# Altium PCB dAir-aster-0_0_0_2.PcbDoc (part 1 of 2)
Units mm, origin at the board's own origin, x right, y up, seen from the top; angles counter-clockwise.
Board outline 87.04 x 95 mm, 2 copper layers (Top Layer, Bottom Layer); 84 components, 50 nets, 318 pads, 280 vias.
Unrouted connection lines stored in the file: 4.
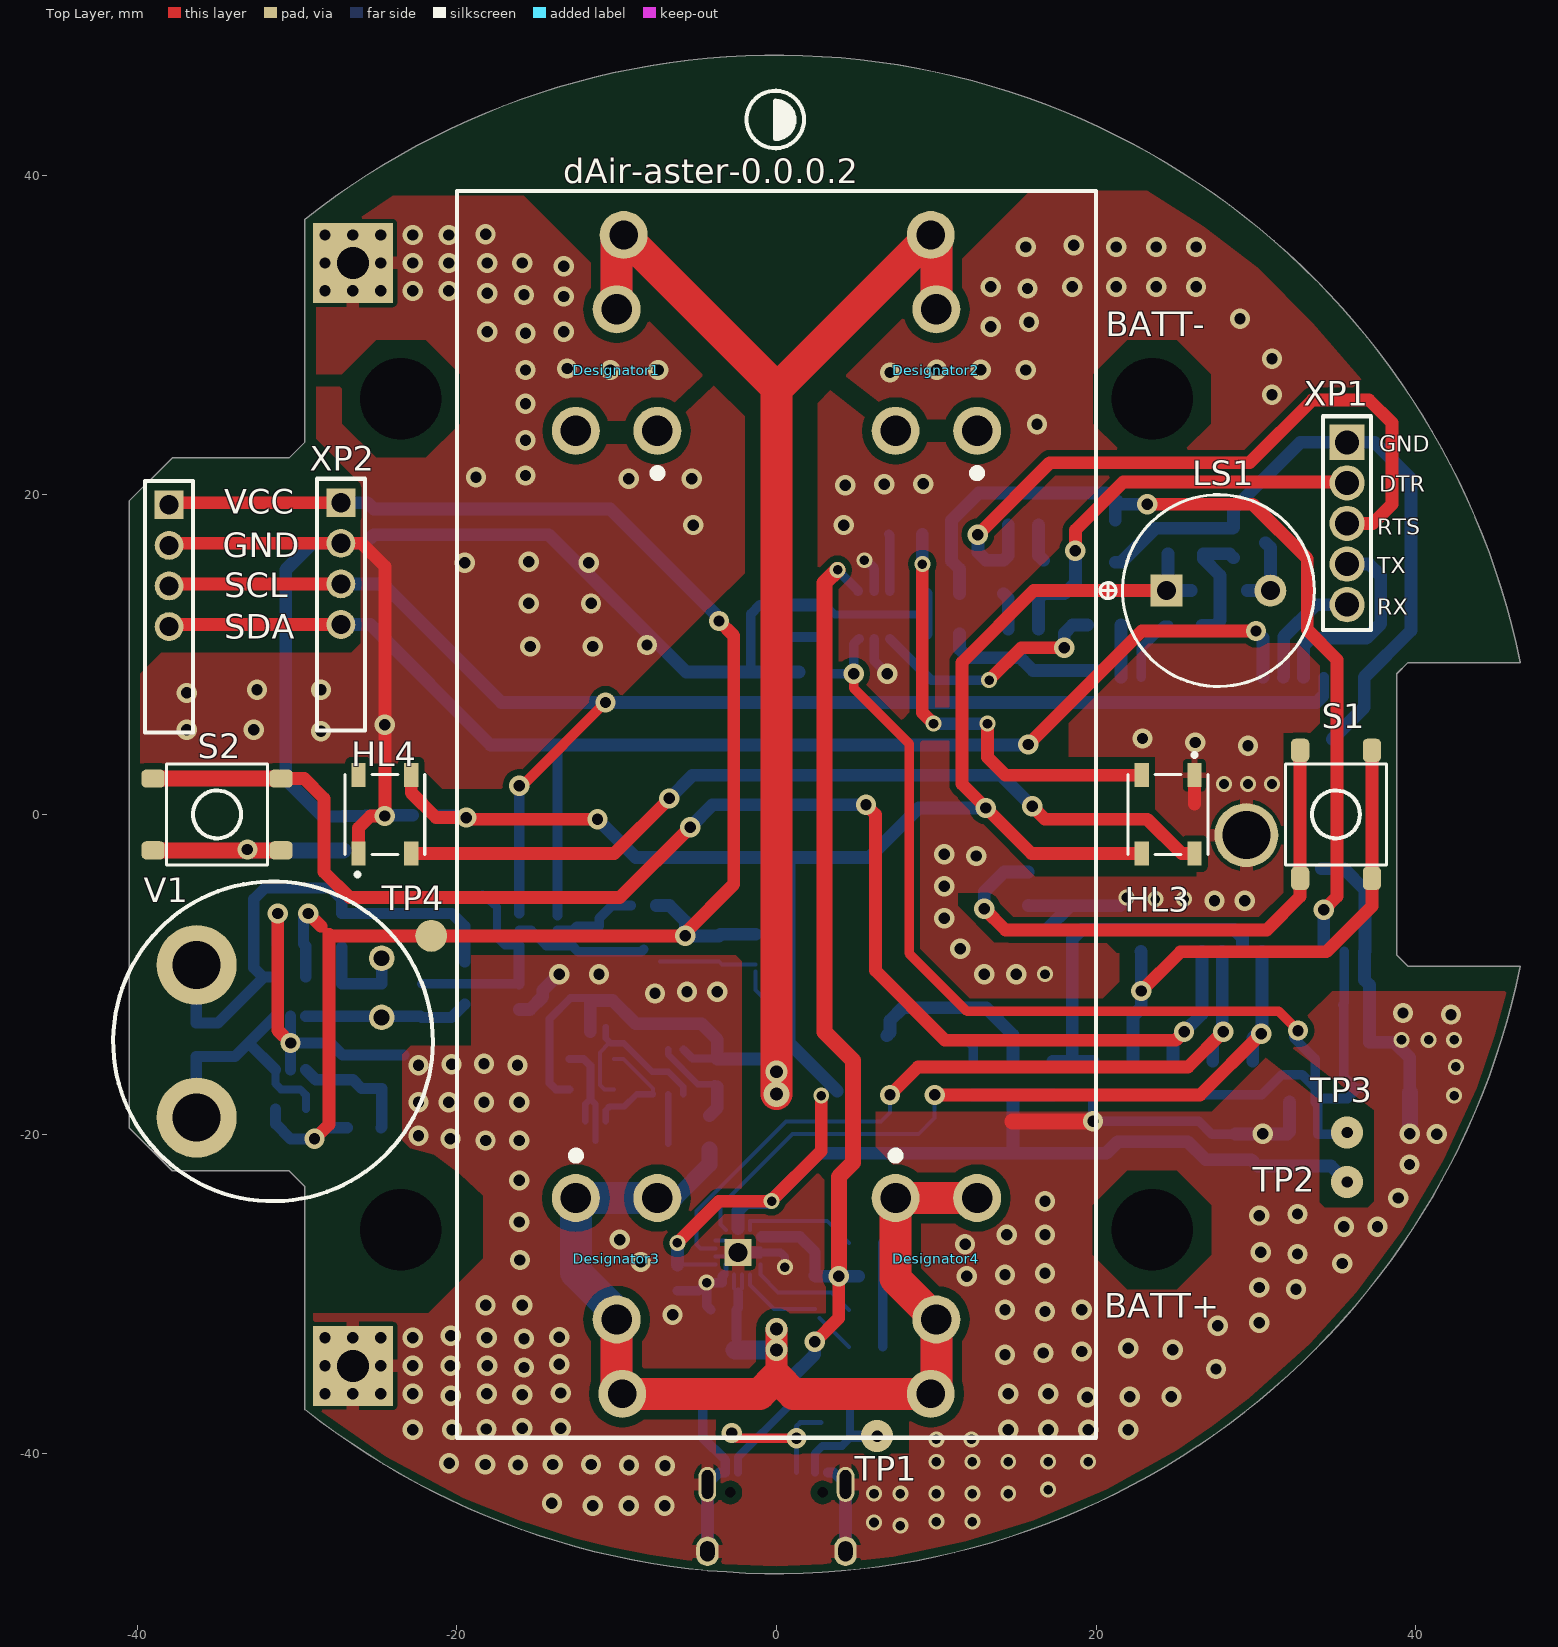
[diagram p0: Top Layer view]
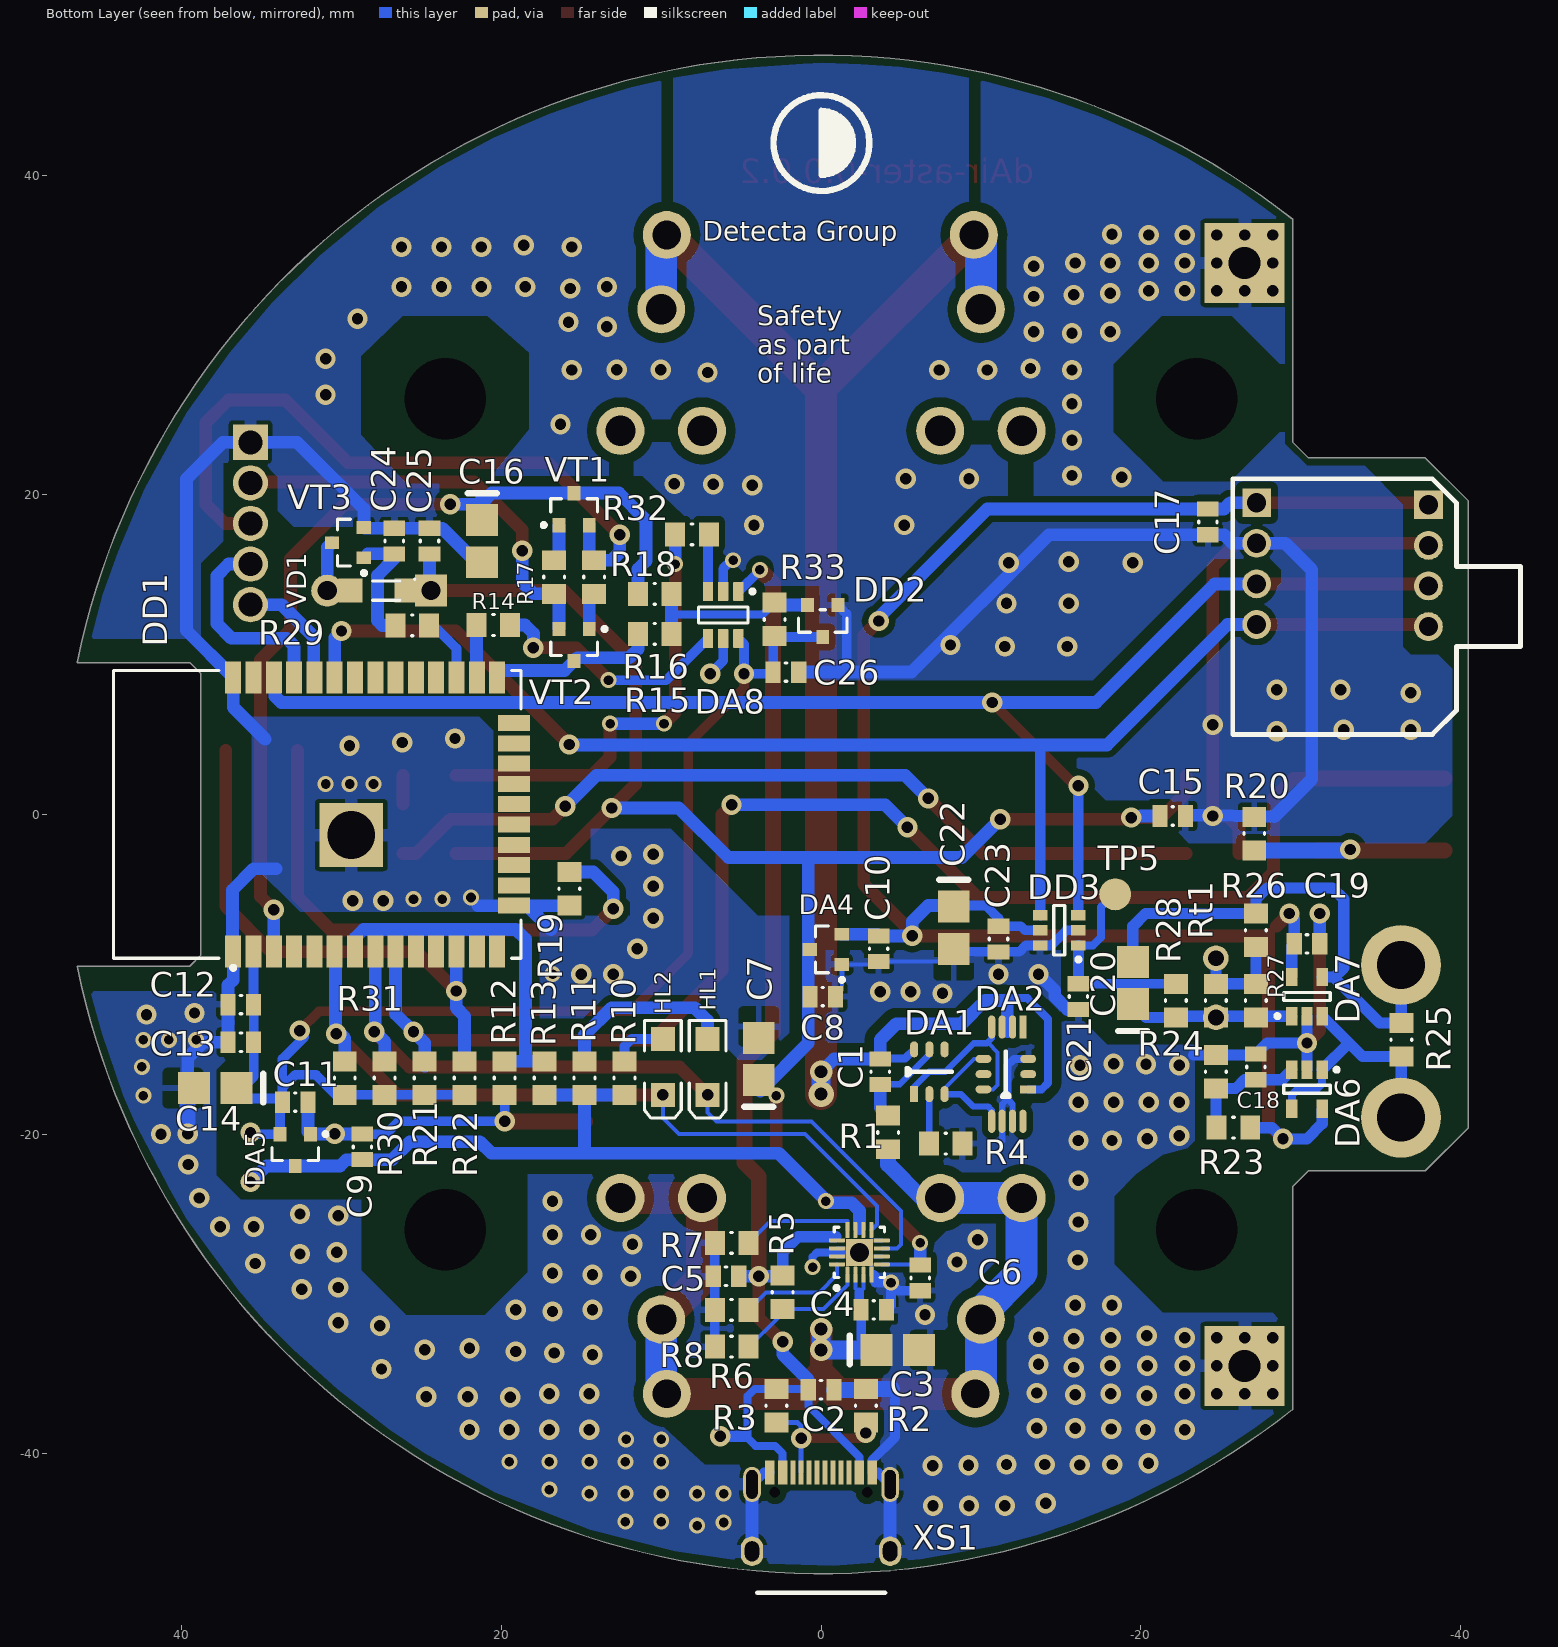
[diagram p1: Bottom Layer view, seen from below]
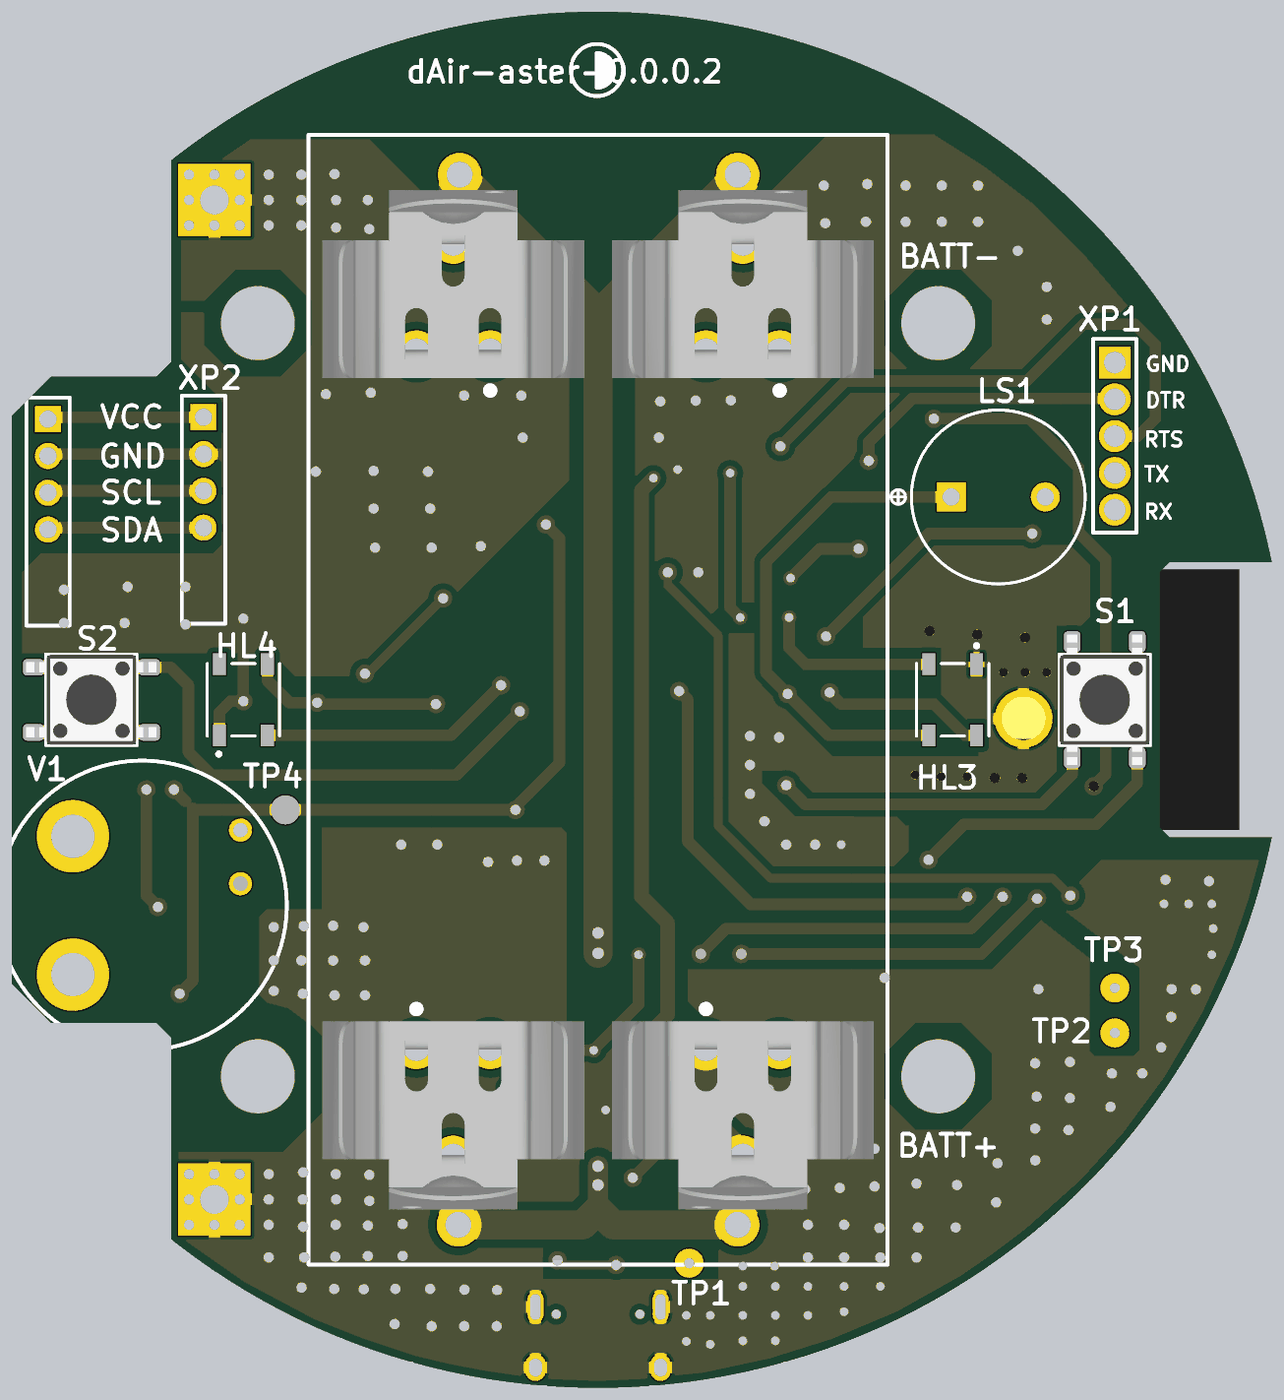
[diagram p2: 3D render of the assembled board from above, using the file's embedded part models]

## Layer stack, top to bottom
Top Solder: solder mask 0.0102, Solder Resist, Dk 3.5
Top Layer: signal copper 0.0356
Dielectric 1: dielectric 0.32, FR-4, Dk 4.8
Bottom Layer: signal copper 0.0356
Bottom Solder: solder mask 0.0102, Solder Resist, Dk 3.5

## Board outline
-37.8,-22.3 -40.5,-19.6 -40.5,19.6 -37.8,22.3 -30.5,22.3 -29.5,23.3 -29.5,37.225 -29.505,37.225 cw(c0,0) 46.54,9.5 46.539,9.5 39.5,9.5 38.8,8.8 38.8,-8.8 39.5,-9.5 46.539,-9.5 46.54,-9.5 cw(c0,0) -29.495,-37.233 -29.5,-37.24 -29.5,-23.3 -30.5,-22.3

## Design rules (kind name [scope] priority, off if disabled: settings)
Clearance bat- [InNet('NetBAT1_2') vs InNet('GND')] p1: gap=0.6 ignorepadtopadclearanceinfootprint=FALSE
Clearance bat [InNet('NetBAT1_1') vs InNet('GND')] p2: gap=0.6 ignorepadtopadclearanceinfootprint=FALSE
Clearance Polygons [InNet('GND')] p3: gap=0.4 ignorepadtopadclearanceinfootprint=FALSE
Clearance [All] p4: gap=0.15 ignorepadtopadclearanceinfootprint=FALSE
PlaneConnect [InNet('GND')] p1: planeconnectstyle=Direct reliefexpansion=0.508 reliefentries=4 reliefconductorwidth=0.5 reliefairgap=0.254
PolygonConnect [InNet('GND')] p1: thpad.connectstyle=Relief thpad.reliefconductorwidth=0.8 thpad.reliefentries=4 thpad.polygonreliefangle="90 Angle" thpad.airgapwidth=0.254 smdpad.connectstyle=Relief smdpad.reliefconductorwidth=0.4 smdpad.reliefentries=4 smdpad.polygonreliefangle="90 Angle" smdpad.airgapwidth=0.254 via.connectstyle=Direct via.reliefconductorwidth=0.254 via.reliefentries=4 via.polygonreliefangle="90 Angle" via.airgapwidth=0.254
RoutingVias [All] p1: holewidth=0.711 width=1.27 viastyle="Through Hole" minholewidth=0.711 minwidth=1.27 maxholewidth=0.711 maxwidth=1.27
SolderMaskExpansion [All] p1: expansion=0.102
Width [All] p1: maxlimit=3 minlimit=0.2 preferedwidth=0.254
29 further rules are at their usual default settings.

## Classes and differential pairs
component class dAir-type-C: C1 C2 C3 C4 C5 C6 C7 C8 C9 C10 C11 C12 C13 C14 C15 C16 C17 C18 C19 C20 C21 C22 C23 C24 C25 DA1 DA2 DA4 DA5 DA6 DA7 DD1 DD2 DD3 HL1 HL2 LS1 R1 R2 R3 R4 R5 R6 R7 R8 R10 R11 R12 R13 R14 R15 R16 R17 R18 R19 R20 R21 R22 R23 R24 R25 R26 R27 R28 R29 R30 R31 Rt1 S2 V1 VD1 VT1 VT2 VT3 XS1

## Components (designator, comment, footprint, x,y, rotation, side; value= is the part's Value field where it differs from the comment)
C1 "100nF" CAPC0805(2012)155_L -3.7,-16.1 r90 bottom value=4.7uF
C2 "100nF" CAPC0805(2012)155_L 0,-36 r180 bottom value=4.7uF
C3 "47uF" KEMT-A-3216-18-2_M -4.8,-33.5 r180 bottom
C4 "4.7uF" CAPC0805(2012)155_L -3.3,-31 r180 bottom
C5 "1uF" CAPC0805(2012)155_L 5.95,-28.9 r0 bottom value=4.7uF
C6 "4.7uF" CAPC0805(2012)155_L -6.2,-29 r270 bottom
C7 "47uF" KEMT-A-3216-18-2_M 3.9,-15.3 r90 bottom
C8 "1uF" CAPC0805(2012)155_L -0.1,-11.4 r0 bottom value=4.7uF
C9 "1uF" CAPC0805(2012)155_L 28.7,-20.8 r270 bottom value=4.7uF
C10 "1uF" CAPC0805(2012)155_L -3.6,-8.4 r90 bottom value=4.7uF
C11 "1uF" CAPC0805(2012)155_L 32.9,-18 r0 bottom value=4.7uF
C12 "1nF" CAPC0805(2012)155_L 36.3,-11.9 r180 bottom value=4.7uF
C13 "0.1uF" CAPC0805(2012)155_L 36.3,-14.25 r180 bottom value=4.7uF
C14 "100uF" KEMT-A-3216-18-2_M 37.9,-17.125 r0 bottom
C15 "0.1uF" CAPC0805(2012)155_L -22,-0.1 r0 bottom value=4.7uF
C16 "0.1uF" KEMT-A-3216-18-2_M 21.2,17.1 r270 bottom
C17 "0.1uF" CAPC0805(2012)155_L -24.2,18.3 r90 bottom value=4.7uF
C18 "0.1uF" CAPC0805(2012)155_L -27.2,-15.8 r270 bottom value=4.7uF
C19 "1uF" CAPC0805(2012)155_L -30.4,-8.1 r180 bottom value=4.7uF
C20 "47uF" KEMT-A-3216-18-2_M -19.5,-10.55 r90 bottom
C21 "0.1uF" CAPC0805(2012)155_L -16.1,-11.4 r270 bottom value=4.7uF
C22 "10uF" KEMT-A-3216-18-2_M -8.3,-7.1 r270 bottom
C23 "0.1uF" CAPC0805(2012)155_L -11.1,-7.8 r90 bottom value=4.7uF
C24 "100 nF" CAPC0805(2012)155_L 26.7,17.1 r90 bottom value=4.7uF
C25 "1mF" CAPC0805(2012)155_L 24.5,17.1 r90 bottom value=4.7uF
C26 "100nF" CAPC0805(2012)155_L 2.2,8.9 r180 bottom value=4.7uF (schematic designator C10)
DA1 "dw01v" dw01v -5.825,-17.5 r90 bottom
DA2 "Comment" fs8205-sot23-6 -12.96,-17.2 r0 bottom
DA4 "" ONSC-SOT-23-3-318-08_V -0.3,-8.45 r0 bottom
DA5 "" ONSC-SOT-23-3-318-08_V 32.9,-21 r270 bottom
DA6 "AD8603AUJ-REEL" ADI-UJ-5_M -30.4,-17.2 r270 bottom
DA7 "AD8603AUJ-REEL" ADI-UJ-5_M -30.4,-11.4 r90 bottom
DA8 "Comment" DBV0006A_M 6.125,12.475 r270 bottom
DD1 "ESP-WROOM-32" OLMX-ESP-WROOM-32 28,0 r90 bottom
DD2 "MAX809(SOT23)" FP-318-08-MFG -0.1,12.1 r270 bottom
DD3 "MCP3421A2T-E/CH" SOT-23-CH6_L -14.9,-7.25 r0 bottom
Designator1 "Comment" KEYSTONE-CLIPS_54-3_V -10,28.701 r180 top locked
Designator2 "Comment" KEYSTONE-CLIPS_54-3_V 10,28.701 r180 top locked
Designator3 "Comment" KEYSTONE-CLIPS_54-3_V -10,-28.701 r0 top locked
Designator4 "Comment" KEYSTONE-CLIPS_54-3_V 10,-28.701 r0 top locked
HL1 "LED2" 3.2X1.6X1.1 7.1,-15.8 r270 bottom
HL2 "LED2" 3.2X1.6X1.1 9.9,-15.8 r270 bottom
LS1 "KPI1410(temporally)" CZCY-CY-12085G-5042-2_V 27.65,14 r0 top
R1 "300" RESC0805(2012)_M -4.2,-19.9 r90 bottom value="4.30 Ohm"
R2 "5.1k" RESC0805(2012)_M -2.8,-37 r90 bottom value="4.30 Ohm"
R3 "56k" RESC0805(2012)_M 2.8,-37 r90 bottom value="4.30 Ohm"
R4 "1k" RESC0805(2012)_M -7.8,-20.6 r180 bottom value="4.30 Ohm"
R5 "1k" RESC0805(2012)_M 2.4,-29.9 r270 bottom value="4.30 Ohm"
R6 "1k" RESC0805(2012)_M 5.6,-33.3 r0 bottom value="4.30 Ohm"
R7 "1k" RESC0805(2012)_M 5.6,-26.8 r0 bottom value="4.30 Ohm"
R8 "1k" RESC0805(2012)_M 5.6,-31 r0 bottom value="4.30 Ohm"
R10 "1k" RESC0805(2012)_M 12.3,-16.5 r90 bottom value="4.30 Ohm"
R11 "1k" RESC0805(2012)_M 14.8,-16.5 r90 bottom value="4.30 Ohm"
R12 "470k" RESC0805(2012)_M 19.8,-16.5 r90 bottom value="4.30 Ohm"
R13 "100k" RESC0805(2012)_M 17.3,-16.5 r270 bottom value="4.30 Ohm"
R14 "470" RESC0805(2012)_M 20.5,11.85 r0 bottom value="4.30 Ohm"
R15 "10k" RESC0805(2012)_M 10.4,11.3 r180 bottom value="4.30 Ohm"
R16 "10k" RESC0805(2012)_M 10.4,13.8 r0 bottom value="4.30 Ohm"
R17 "10k" RESC0805(2012)_M 16.7,14.85 r270 bottom value="4.30 Ohm"
R18 "10k" RESC0805(2012)_M 14.2,14.85 r90 bottom value="4.30 Ohm"
R19 "470" RESC0805(2012)_M 15.75,-4.65 r90 bottom value="4.30 Ohm"
R20 "470" RESC0805(2012)_M -27.1,-1.2 r270 bottom value="4.30 Ohm"
R21 "47k" RESC0805(2012)_M 24.8,-16.5 r270 bottom value="4.30 Ohm"
R22 "47k" RESC0805(2012)_M 22.3,-16.5 r270 bottom value="4.30 Ohm"
R23 "1M" RESC0805(2012)_M -25.8,-19.6 r180 bottom value="4.30 Ohm"
R24 "150k" RESC0805(2012)_M -24.7,-16.1 r270 bottom value="4.30 Ohm"
R25 "200" RESC0805(2012)_M -36.3,-14.1 r90 bottom value="4.30 Ohm"
R26 "120k" RESC0805(2012)_M -27.2,-7.25 r270 bottom value="4.30 Ohm"
R27 "100k" RESC0805(2012)_M -27.2,-11.65 r270 bottom value="4.30 Ohm"
R28 "100" RESC0805(2012)_M -22.2,-11.65 r90 bottom value="4.30 Ohm"
R29 "470" RESC0805(2012)_M 25.575,11.825 r180 bottom value="4.30 Ohm"
R30 "47k" RESC0805(2012)_M 27.3,-16.5 r90 bottom value="4.30 Ohm"
R31 "47k" RESC0805(2012)_M 29.8,-16.5 r90 bottom value="4.30 Ohm"
R32 "1k" RESC0805(2012)_M 8.075,17.525 r0 bottom value="4.30 Ohm" (schematic designator R6)
R33 "1k" RESC0805(2012)_M 2.9,12.2 r90 bottom value="4.30 Ohm" (schematic designator R15)
Rt1 "47k" RESC0805(2012)_M -24.7,-11.65 r270 bottom value="4.30 Ohm"
S1 "Comment" DIPT-DTSM-6_V 35,0 r90 top locked
S2 "Comment" DIPT-DTSM-6_V -35,0 r0 top locked
V1 "ME2 CO" "ME2 CO" -31.5,-14.2 r315 top
VD1 "LL4148" INF-SOD323_V 27.2,14 r270 bottom
VT1 "bc847" ONSC-SOT-23-3-318-08_V 15.45,19.1 r90 bottom
VT2 "bc847" ONSC-SOT-23-3-318-08_V 15.45,10.6 r270 bottom
VT3 "" ONSC-SOT-23-3-318-08_V 29.6,17 r0 bottom
XS1 "Comment" "USB Type C 16P" 0,-46.1 r180 bottom locked

## Footprints (in the part's own frame and the unit in brackets; to place one, negate y for a bottom-side part, rotate by r counter-clockwise, add the part's x,y. Pads: shape width x height; smd on the part's side, far side on the other; paste and mask are expansions set on the pad)
3.2X1.6X1.1 [mm] "SMT LED; 2 Flat Leads"
  rect 1.5x1.5 smd: 1(-1.75,0) 2(1.75,0)
  silkscreen extent -2.9,-1.15 3.2,1.15
ADI-UJ-5_M [mm] "SOT23, 5-Leads, Body 2.9x1.6mm, Pitch 0.95mm, IPC Low Density"
  rect 1.15x0.7 smd: 1(-1.225,0.95) 2(-1.225,0) 3(-1.225,-0.95) 4(1.225,-0.95) 5(1.225,0.95)
  silkscreen extent -1.35,-1.45 0.25,1.97, body extent -0.8,-1.45 0.8,1.45, height 1
CAPC0805(2012)155_L [mm] "Chip Capacitor, Body 2.0x1.2mm, Height 1.55mm, IPC High Density"
  rect 0.95x1.35 smd: 1(-0.8,0) 2(0.8,0)
  silkscreen extent -0.05,-0.58 0.05,0.58, body extent -1.1,-0.72 1.1,0.72, height 1.55
CZCY-CY-12085G-5042-2_V [mm] "Through-hole Buzzer, 2-Leads, Dia 12mm, Height 8.5mm"
  rect 2x2 hole 1.2: 1(-3.25,0)
  round 2 hole 1.2: 2(3.25,0)
  Mechanical 13 keep-out circle w0.1: c0,0 r6
  silkscreen extent -7.41,-6 6,6, body extent -6,-6 6,6, height 8.5
DBV0006A_M [mm] "SOT23, 6-Leads, Body 3.05x1.75mm, Pitch 0.95mm, IPC Low Density"
  rrect15% 1.2x0.65 smd: 1(-1.475,0.95) 2(-1.475,0) 3(-1.475,-0.95) 4(1.475,-0.95) 5(1.475,0) 6(1.475,0.95)
  silkscreen extent -1.6,-1.55 0.5,1.95, body extent -1.42,-1.46 1.42,1.46, height 1.11
DIPT-DTSM-6_V [mm] "Switch, Through-Hole, 4 Leads, Body 8.5x8.5mm, Row Spacing 9.0mm, Pitch 4.5mm"
  rrect50% 1.448x1.143 smd: 1(4.01,-2.25) 2(-4,-2.25) 3(4.01,2.24) 4(-4,2.24)
  silkscreen extent -3.16,-3.16 3.15,3.15, body extent -4.5,-3.1 4.5,3.1, height 4.5
dw01v [mm]
  rect 1x0.5 smd: 1(0,0)
  oval 1x0.5 smd: 2(0,-0.95) 3(0,-1.9) 4(2.8,-1.9) 5(2.8,-0.95) 6(2.8,0)
  silkscreen extent 1.16,-2.38 1.64,0.48
FP-318-08-MFG [mm]
  rect 0.9x0.8 smd paste+0 mask+0: 1(-1,0.95) 2(-1,-0.95) 3(1,0)
  silkscreen extent -0.7,-1.52 0.7,1.52, body extent -1.18,-1.45 1.22,1.45, height 1.11
fs8205-sot23-6 [mm]
  oval 1x0.5 smd: 1(0,-0.95) 4(2.8,0) 5(2.8,-1.9) 7(0,-1.9) 8(2.8,-0.95)
  rect 1x0.5 smd: 2(0,0)
  silkscreen extent 1.16,-2.38 1.64,0.48
INF-SOD323_V [mm] "SOD, 2-Leads, Body 1.7x1.25 mm"
  rect 1.5x1.5 smd: 1(0,1.25) 2(0,-2.25)
  silkscreen extent -0.76,-0.85 0.6,1.83, body extent -0.63,-0.85 0.63,0.85, height 1.1
KEMT-A-3216-18-2_M [mm] "Molded TAN Capacitor, 2-Leads, Body 3.4x1.8mm, IPC Low Density"
  rect 2x2 smd: 1(-1.325,0) 2(1.325,0)
  silkscreen extent -3,-0.9 -3,0.9, body extent -1.7,-0.9 1.7,0.9, height 1.8
KEYSTONE-CLIPS_54-3_V [mm] "3-Pin Hand Drawn, Body 18.102x13.004mm"
  round 3 hole 1.9: 1(-2.55,4.702) 2(2.55,4.702) 3(0,-2.898)
  silkscreen extent -2.8,7.1 -2.3,7.6, body extent -9.05,-6.5 9.05,6.5, height 18
"ME2 CO" [mm]
  round 5 hole 3: 1(-6.75,0) 2(0,-6.75)
  silkscreen extent -10,-10 10,10
OLMX-ESP-WROOM-32 [mm] "SMD, 38-Leads, Body 18x25.5mm, Pitch 1.27mm"
  rect 2x1 smd: 1(-8.575,8.78) 2(-8.575,7.51) 3(-8.575,6.24) 4(-8.575,4.97) 5(-8.575,3.7) 6(-8.575,2.43) 7(-8.575,1.16) 8(-8.575,-0.11) 9(-8.575,-1.38) 10(-8.575,-2.65) 11(-8.575,-3.92) 12(-8.575,-5.19) 13(-8.575,-6.46) 14(-8.575,-7.73) 25(8.575,-7.73) 26(8.575,-6.46) 27(8.575,-5.19) 28(8.575,-3.92) 29(8.575,-2.65) 30(8.575,-1.38) 31(8.575,-0.11) 32(8.575,1.16) 33(8.575,2.43) 34(8.575,3.7) 35(8.575,4.97) 36(8.575,6.24) 37(8.575,7.51) 38(8.575,8.78)
  rect 4x4 / inner rect 4x4 / far side round 4 hole 3: 1(-1.3,1.395)
  rect 1x2 smd: 15(-5.715,-8.78) 16(-4.445,-8.78) 17(-3.175,-8.78) 18(-1.905,-8.78) 19(-0.635,-8.78) 20(0.635,-8.78) 21(1.905,-8.78) 22(3.175,-8.78) 23(4.445,-8.78) 24(5.715,-8.78)
  silkscreen extent -9.72,-9.23 9,16.27, body extent -9.04,-9.25 9.03,16.29, height 3.04
ONSC-SOT-23-3-318-08_V [mm] "SOT23, 3-Leads, Body 2.92x1.3mm, Pitch 0.95mm"
  rect 0.9x0.8 smd: 1(-1,0.95) 2(-1,-0.95) 3(1,0)
  silkscreen extent -1.12,-1.46 0.65,2.02, body extent -0.65,-1.46 0.65,1.46, height 1.11
RESC0805(2012)_M [mm] "Chip Resistor, Body 2.0x1.3mm, IPC Low Density"
  rect 1.25x1.5 smd: 1(-1.05,0) 2(1.05,0)
  silkscreen extent -0.05,-0.65 0.05,0.65, body extent -1.1,-0.67 1.1,0.67, height 0.7
SOT-23-CH6_L [mm] "SOT23, 6-Leads, Body 2.9x1.7mm, Pitch 0.95mm, Lead Span 2.8mm, IPC High Density"
  rect 0.9x0.65 smd: 1(-1.2,0.95) 2(-1.2,0) 3(-1.2,-0.95) 4(1.2,-0.95) 5(1.2,0) 6(1.2,0.95)
  silkscreen extent -1.32,-1.55 0.35,1.95, body extent -0.9,-1.55 0.9,1.55, height 1.45
"USB Type C 16P" [mm]
  round 0 hole 0.65: 3(-2.89,3.68) 3(2.89,3.68)
  rect 0.6x1.5 smd: A1B12(-3.2,4.93) A4B9(-2.4,4.93) B1A12(3.2,4.93) B4A9(2.4,4.93)
  rect 0.3x1.5 smd: A5(-1.25,4.93) A6(-0.25,4.93) A7(0.25,4.93) A8(1.25,4.93) B5(1.75,4.93) B6(0.75,4.93) B7(-0.75,4.93) B8(-1.75,4.93)
  oval 1.4x1.85 hole 0.9 slot 1.25 at 90 deg: Shell(-4.32,0) Shell(4.32,0)
  oval 1.1x2.2 hole 0.7 slot 1.8 at 90 deg: Shell(-4.32,4.18) Shell(4.32,4.18)
  silkscreen extent -4,-2.6 4,-2.6

## Part data
C1 C2 C4 C5 C6 C8 C9 C10 C11 C12 C13 C15 C17 C18 C19 C21 C23 C26: library part CMP-1036-04882-1, "CAP 4.7uF 10V ±10% 0805 (2012 Metric) Thickness 1.55mm SMD", Case-EIA=0805, Case-Metric=2012, Rated Voltage="10 V", Tolerance=A±10%, Max Thickness="1.55 mm", Technology=SMT
C3 C7 C14 C16 C20 C22: library part CMP-2000-05172-1, Capacitance=10µF, ESR (Equivalent Series Resistance)=3.8Ohm, Lifetime @ Temp.=2000Hrs@85degC, Manufacturer=Kemet, Manufacturer Size Code=A, Operating Temperature=-55degC~125degC, Package / Case=1206(3216Metric), Package Description="2-Pin Surface Mount Device, Body 3.2 x 1.6 mm", Package Reference=1206, Standard Package=2,000, Tolerance=±10%, Voltage - Rated=10V, Catalog Drawings=T49x,T5xxSeries_A-side1T49x,T5xxSeries_A,B-side2T49x,T5xxSeries_A,SBottom, Category=Capacitors, Datasheet URL=http://www.farnell.com/datasheets/1824869.pdf, Datasheet Version=Apr-14, Family=TantalumCapacitors, Features=GeneralPurpose, Height - Seated (Max)="0.071\"(1.80mm)", Lead Spacing=-, Manufacturer URL=http://www.kemet.com/, Mounting Type=SurfaceMount, Online Catalog=T491Series, Other Names=399-3684-2, Packaging=Tape&Reel(TR), Product Training Modules=CapacitorBasics-TypicalUsesforCapacitorsDeratingGuidelinesforSurfaceMountTantalumCapacitors, Series=T491, Size / Dimension="0.126\"Lx0.063\"W(3.20mmx1.60mm)", Type=Molded
C24 C25: library part CMP-1036-04882-1, "CAP 4.7uF 10V ±10% 0805 (2012  Thickness 1.55mm SMD", Case-EIA=0805, Case-Metric=2012, Rated Voltage="10 V", Tolerance=A±10%, Max Thickness="1.55 mm", Technology=SMT
DA2: library part fs8205
DA4 DA5: library part CMP-0204-00106-1, "100mA Low Power LDO, Output Voltage 3.0V, SOT89 Pkg", Code_IPC=SOT89, DatasheetVersion="Rev1.80, Mar-2010", PackageDescription="3-Pin SOT-89 Package 1.5 mm Pitch, 4.1 mm Lead Span", PackageReference=SOT89, PackageVersion=May-2010
DA6 DA7: library part CMP-0384-02070-2, "Single Channel Single-Supply Operation Operational Amplifier, 400 KHz BW, 100 mV/us SR, Industrial, 5-pin SOT23 (UJ-5), Reel", Amplifiers Per Package=1, Generic Part Number=AD8603, Input Bias Current=200fA, Input Offset Voltage=12uV, Manufacturer="Analog Devices", Code_JEDEC=MO-193-AB, ComponentLink1Description="Manufacturer URL", ComponentLink1URL=http://www.analog.com/en/index.html, ComponentLink2Description=Datasheet, ComponentLink2URL=http://www.analog.com/static/imported-files/data_sheets/AD8603_8607_8609.pdf, ComponentLink3Description="Package Specification", ComponentLink3URL=http:/www.analog.com/static/imported-files/packages/PKG_PDF/TSOT(UJ)/UJ_5.pdf, ComponentLink4Description="Reference Circuit", ComponentLink4URL=http://www.analog.com/en/all-operational-amplifiers-op-amps/operational-amplifiers-op-amps/ad8603/products/product.html#product-recommendations, DatasheetVersion="Rev. C", Iq/Amp=50uA, Mounting Technology="Surface Mount", PackageDescription="5-Pin Thin Small Outline Transistor Package, Body 2.9 x 1.6 mm, Pitch 0.95 mm", PackageReference=UJ-5, PackageVersion=100708-A, PartNumber=AD8603AUJ-REEL, RevisionNote="Reference Circuit URL fixed", Slew Rate=100mV/us, Small Signal Bandwidth=400KHz, V Span Max=6V, V Span Min=1.8V
DD1: library part CMP-2000-07454-1, "Espressif System, 2.7 to 3.6 V, -40 to 85 degC, 38-Pin SMD", Manufacturer=Olimex, Package Description="38-Pin Surface Mount Device, Body 18 x 25.5 mm, Pitch 1.27 mm", Datasheet URL=http://www.espressif.com/sites/default/files/documentation/esp-wroom-32_datasheet_en.pdf, Datasheet Version="Rev. 2.1, 09/2017", Manufacturer URL=https://www.olimex.com, Mounting Technology=SurfaceMount, Package Reference=ESP-WROOM-32, RoHSCompliant=false
DD2: library part CMP-07130-000007-1, "IC MPU SUPERVISORY 2.93V SOT23", Manufacturer="ON SEMICONDUCTOR", Manufacturer Part Number=MAX809STRG, Max Junction Temp=+125°C, Max Supply Voltage=5.5V, Min Supply Voltage=1V, Nominal Supply Current=0.5-0.8uA, Output Current=20mA, Output Voltage=0.3V, Package=318-08, Temperature="-40°C to +125°C", Temperature Range Low=-40°C, Threshold Voltage=2.93V, Automotive=No, Category=IC, ComponentLink2Description=Datasheet, ComponentLink2URL=https://www.onsemi.cn/PowerSolutions/document/MAX809S-D.PDF, Device Class L1="Integrated Circuits (ICs)", Device Class L2="Power Management ICs", Device Class L3="Voltage Supervisors", Digikey Description="IC MPU SUPERVISORY 2.93V SOT23", Footprint Url=https://www.onsemi.com/pub/Collateral/318-08.PDF, Height=1.11mm, Lead Free=Yes, Mouser Description="Supervisory Circuits 2.93V uP Reset", Number Of Outputs=1, Number Of Rails Monitored=1, Octopart=https://octopart.com/max809strg-on+semiconductor-509853, Reset Timeout=10us, Reset Type="Active Low", RoHS=TRUE, Standoff Height=0.01mm, Temperature Range High=+125°C
DD3: library part CMP-0188-00097-2, "18-Bit Analog-to-Digital Converter with I2C Interface and On-Board Reference, 6-Pin SOT-23, Extended Temperature, Tape and Reel", Code_IPC=SOT26A-6, ComponentLink1Description="Manufacturer URL", ComponentLink1URL=http://www.microchip.com/, ComponentLink2Description=Datasheet, ComponentLink2URL=http://ww1.microchip.com/downloads/en/DeviceDoc/22003e.pdf, ComponentLink3Description="Package Specification", ComponentLink3URL=http://www.microchip.com/stellent/groups/techpub_sg/documents/packagingspec/en012702.pdf, DatasheetVersion="revE, Aug-2009", PackageDescription="6-Lead Plastic Small Outline Transistor (CH) [SOT-23]", PackageReference=SOT-23-CH6, PackageVersion="revBB, Aug-2009", RevisionNote="URLs added."
HL1 HL2: "Typical RED, GREEN, YELLOW, AMBER GaAs LED", LatestRevisionDate=17-Jul-2002, LatestRevisionNote="Re-released for DXP Platform.", PackageDescription="SM LED; 2 Flat Leads", PackageReference=3.2X1.6X1.1, PackageVersion=Feb-2002, Published=8-Jun-2000, Publisher="Altium Limited"
LS1: library part CMP-1019-00001-1, "Buzzer, 5 V, 42 Ohm, -20 to 70 degC, 2-Pin THD, Dia 12 mm, Height 8.5 mm, RoHS, Tray", Current Consumption (Max.)="35 mA", Manufacturer="Changzhou Chaoyin", Operating Temperature Range="-20 to 70 degC", Oscillation Frequency="2.048 KHz", PartNumber=cy-12085G-5042, Rated Voltage="5 V", Resistance Value="42 +/- 4 Ohm", Mounting Technology="Through Hole", PackageDescription="2-Pin Through-hole Buzzer, Dia 12 mm, Height 8.5 mm", PackageReference=CY-12085G-5042, Packing=Tray, RoHS=TRUE, Sound Pressure Level (Min.)="85 dB"
R1 R2 R3 R4 R5 R6 R7 R8 R10 R11 R12 R13 R14 R15 R16 R17 R18 R19 R20 R21 R22 R23 R24 R25 R26 R27 R28 R29 R30 R31 R32 R33 Rt1: library part CMP-1013-00017-1, Case-EIA=0805, Case-Metric=2012, Power="0.125 W", Tolerance="5 %", Technology=SMT
S2: library part CMP-2000-07501-1, "FSMSM Push Button Switch, 50 mA, -35 to 85 degC, 2-Pin SMD, RoHS, Tape and Reel", Case\/Package=SMD/SMT, Contact Current Rating=50mA, Contact Resistance=100mOhm, Manufacturer="TE Connectivity", Max Operating Temperature=85degC, Max Voltage Rating (DC)=12V, Min Operating Temperature=-35degC, Operating Force=180gf, Package Description="2-Pin Surface Mount Device, Body 6 x 3.5 mm, Pitch 9.19 mm", Package Quantity=1800, Package Reference=FSMSMTR, Voltage Rating (DC)=24V, Actuator Length=1.07mm, Actuator Material=Polyamide, Contact Material=Brass, Contact Plating=Silver, Current Rating=50mA, Datasheet URL=http://www.te.com/commerce/DocumentDelivery/DDEController?Action=showdoc&DocId=Customer+Drawing%7F1437566-3%7FC2%7Fpdf%7FEnglish%7FENG_CD_1437566-3_C2_1437566_3_1_c.dwg.pdf%7F1437566-4, Datasheet Version="Rev. C2, 08/2014", Electrical Life=20000Cycles, ELV=Compliant, Illumination Type=Illuminated, Lead Free=LeadFree, Manufacturer URL=http://www.te.com/, Mechanical Life=20000Cycles, Mount=SurfaceMount, Mounting Technology=SurfaceMount, Orientation=Straight, Packaging=TapeandReel, REACH SVHC=Unknown, RoHSCompliant=true, Switch Travel=0.25mm, Termination=GullWing, Throw Configuration=SPST
VD1: library part CMP-1182-00006-1, "Silicon Schottky Diode, SOD323, Reel, Green", Manufacturer=Infineon, PartNumber="BAT 54-03W E6327", ComponentLink1Description="Manufacturer URL", ComponentLink1URL=http://www.infineon.com/, ComponentLink2Description=Datasheet, ComponentLink2URL=http://www.infineon.com/dgdl/bat54series.pdf?folderId=db3a30431400ef68011425f1ca2505e3&fileId=db3a304314dca3890115190b74210ea6, ComponentLink3Description="Package Specification", ComponentLink3URL=http://www.infineon.com/dgdl/SOD323-Package_Overview.pdf?folderId=db3a30431936bc4b011952aab84f3bbe&fileId=db3a30431936bc4b011952beed653be3, Green=TRUE, Mounting Technology="Surface Mount", PackageDescription="2-Pin Small Outline Diode Package, 1.25 x 1.7 mm Body", PackageReference=SOD323, Packing=Reel, RevisionNote="Lost Devices pt2"
VT1 VT2 VT3: library part CMP-1048-00737-1, "General Purpose Transistor, NPN Silicon, 3-Pin SOT-23, Pb-Free, Tape and Reel", Manufacturer="On Semiconductor", PartNumber=BC817-25LT1G, ComponentLink1Description="Manufacturer URL", ComponentLink1URL=http://www.onsemi.com/, ComponentLink2Description=Datasheet, ComponentLink2URL=http://www.onsemi.com/pub_link/Collateral/BC817-16LT1-D.PDF, ComponentLink3Description="Package Specification", ComponentLink3URL=http://www.onsemi.cn/pub_link/Collateral/318-08.PDF, DatasheetVersion="Rev. 12", fT Min (MHz)=100, IC Continuous (A)=0.5, Mounting Technology="Surface Mount", PackageDescription="3-Pin Small Outline Transistor, Body 2.92 x 1.3 mm, Pitch 0.95 mm", PackageReference=SOT-23-3-318-08, PackageVersion="Rev. AP, 11/2009", Packing="Tape and Reel", Polarity=NPN, RoHS=TRUE
XS1: library part CMP-04767-000004-1, "CONN RCP USB3.1 TYPEC 24P SMD RA", Current Rating=0.25/1.25/5A, Manufacturer=Molex, Manufacturer Part Number=1054500101, Package=0, Temperature="-30°C to +85°C", Temperature Range High=+85°C, Temperature Range Low=-30°C, Voltage Rating=30V, Automotive=No, Category=Conn, ComponentLink2Description=Datasheet, ComponentLink2URL=https://www.molex.com/webdocs/datasheets/pdf/en-us/1054500101_IO_CONNECTORS.pdf, Conn Orientation="Right Angle", Contact Material=Gold,Nickel, Device Class L1=Connectors, Device Class L2="USB Connectors", Device Class L3=unset, Digikey Description="CONN RCP USB3.1 TYPEC 24P SMD RA", Footprint Url=https://www.molex.com/pdm_docs/sd/1054500101_sd.pdf, Height=3.44mm, Is Female=yes, Lead Free=Yes, Mouser Description="USB Shielded I/O Receptacle; Type C; Right Angle; Surface Mount; Gold over Nickel", Number of Contacts=24, Octopart=https://octopart.com/105450-0101-molex-68082325, Pitch=0.5mm, RoHS=TRUE, Shielding=true, Usb Standard="USB 3.1"

## Free pads (board coordinates)
  rect 1.8x1.8 hole 1.2: 1(-38,19.37) 1(-27.25,19.5)
  round 0 hole 5.1: 1(-23.5,-26) 2(23.5,-26) 3(23.5,26) 4(-23.5,26)
  rect 0.9x1.5 smd: 1(-22.85,2.45) 1(22.85,-2.45) 2(-26.15,2.45) 2(26.15,-2.45) 3(-26.15,-2.45) 3(26.15,2.45) 4(-22.85,-2.45) 4(22.85,2.45)
  rect 0.45x1.45 smd far side: 1(-12.625,-13.3)
  rrect40% 0.25x1 smd far side: 1(-1.65,-28.8) 2(-2.15,-28.8) 3(-2.65,-28.8) 4(-3.15,-28.8) 9(-3.15,-26) 10(-2.65,-26) 11(-2.15,-26) 12(-1.65,-26)
  rect 2.2x2.2 hole 1.5: 1(35.7,23.28)
  round 1.8 hole 1.2: 2(-38,16.83) 2(-27.25,16.96) 3(-38,14.29) 3(-27.25,14.42) 4(-38,11.75) 4(-27.25,11.88)
  oval 0.45x1.45 smd far side: 2(-11.975,-13.3) 3(-11.325,-13.3) 4(-10.675,-13.3) 5(-10.675,-19.2) 6(-11.325,-19.2) 7(-11.975,-19.2) 8(-12.625,-19.2)
  round 2.2 hole 1.5: 2(35.7,20.74) 3(35.7,18.2) 4(35.7,15.66) 5(35.7,13.12)
  rrect40% 1x0.25 smd far side: 5(-3.8,-28.15) 6(-3.8,-27.65) 7(-3.8,-27.15) 8(-3.8,-26.65) 13(-1,-26.65) 14(-1,-27.15) 15(-1,-27.65) 16(-1,-28.15)
  round 1.6 hole 1: 15(-24.7,-12.7) 15(-24.7,-9)
  rrect6% 1.55x1.55 on Bottom Paste: 17(-2.4,-27.4)
  rrect6% 1.7x1.7 hole 1.2 paste-0.85: 17(-2.4,-27.4)
  round 3 hole 1.8: 22(-9.65,-36.25) 22(-9.56,36.25) 22(9.65,-36.25) 22(9.65,36.25)
  rect 5x5 hole 2: 23(-26.5,-34.5) 23(-26.5,34.5)
  round 2 smd far side: 24(-18.4,-5)
  round 2 smd: 25(-21.6,-7.6)

## Via types
v1: diameter 1.27, hole 0.711, Top Layer to Bottom Layer, tented both sides, 233 vias
v2: diameter 1, hole 0.6, Top Layer to Bottom Layer, tented both sides, 40 vias
v3: diameter 1.4, hole 0.8, Top Layer to Bottom Layer, tented both sides, 3 vias
v4: diameter 2/1.27 (per signal layer), hole 0.711, Top Layer to Bottom Layer, 3 vias
v5: diameter 1.6, hole 0.8, Top Layer to Bottom Layer, tented both sides, 1 vias

## Nets (pads, with @x,y where several pads share a name; then routed paths per layer and width w, separated by ;. In a path a pad name is that pad's centre, name@x,y a point inside that pad or via, vN(x,y) a via of type N, cw(c..) or ccw(c..) an arc to the next point about the centre after c; other vN are vias at no path point)
3V: C10.2 C17.2 C19.1 C22.1 C23.2 DA4.2 DA6.5 DA7.5 DD3.5 pad.1@-27.25,19.5 pad.1@-38,19.37 pad.25 R23.2 | length 119
  Top Layer w0.8: pad.1@-38,19.37 -37.87,19.5 pad.1@-27.25,19.5 ; v1(-29.3,-6.2) -28.5,-7 ; v1(-28.9,-20.3) -28,-19.4 -28,-7.5 -27.9,-7.6 pad.25 v1(-5.7,-7.6) -5.7,-7.4 -2.675,-4.375 -2.675,11.175 v1(-3.6,12.1)
  Bottom Layer w0.6: DD3.5 -12.75,-7.25 -12.5,-7 C23.2 -11.1,-6.5 -10.3,-5.7 C22.1@-9.075,-5.7
  Bottom Layer w0.7: DA6.5 -31.35,-19.35 -30.4,-20.3 v1(-28.9,-20.3) -28.2,-19.6 R23.2 ; DA7.5 -29.45,-8.25 C19.1 -29.6,-6.5 v1(-29.3,-6.2)
  Bottom Layer w0.8: pad.1@-27.25,19.5 -25.6,19.5 -25.2,19.1 C17.2 -10.4,19.1 -3.6,12.3 v1(-3.6,12.1) ; C22.1@-7.525,-5.7 -6.7,-5.7 -5.7,-6.7 v1(-5.7,-7.6) C10.2 -3.5,-7.5 DA4.2
5V: C2.1 C5.1 DA8.1 pad.13 R3.2 R5.1 XS1.A4B9 XS1.B4A9 | length 82.3
  Top Layer w0.8: v1(2.4,-33) 3.9,-31.5 v1(3.9,-28.9)
  Top Layer w1: v2(3.825,15.3) 3,14.475 3,-13.6 4.8,-15.4 4.8,-21.775 3.9,-22.675 v1(3.9,-28.9)
  Bottom Layer w0.5: XS1.B4A9 -2.4,-40.2 0.8,-37 C2.1 ; C2.1@0.85,-35.95 R3.2 4.15,-35.95 4.6,-36.4 4.6,-38.8 ; XS1.A4B9 2.4,-39.975 2.875,-39.5 4.1,-39.5 4.7,-38.9
  Bottom Layer w0.6: C2.1 C2.1@0.85,-35.95 ; v2(3.825,15.3) 3.825,15.275 5.1,14 DA8.1@5.1,13.95
  Bottom Layer w0.7: -0.925,-26.425 1.45,-26.425 2.4,-27.375 R5.1 ; 4.7,-38.9 v4(6.3,-38.9)
  Bottom Layer w0.8: C2.1 0.8,-35.375 2.4,-33.775 v1(2.4,-33) ; R5.1 2.45,-28.9 v1(3.9,-28.9) C5.1
+E: C6.1 C7.1 C8.2 C9.2 C15.2 C25.1 DA4.3 DA5.3 LS1.1 pad.1@22.85,-2.45 pad.1@-22.85,2.45 pad.5@-3.8,-28.15 pad.10 pad.11 R10.1 R11.1 R13.2 VD1.1 | length 165.7
  Top Layer w0.8: pad.1@-22.85,2.45 -22.85,1.35 -21.3,-0.2 v1(-19.4,-0.2) -19.3,-0.3 v1(-11.2,-0.3) ; v2(-6.2,-26.8) -3.6,-24.2 v2(-0.3,-24.2) ; v2@-0.325,-24.175 2.8,-21.05 v2(2.8,-17.6) ; pad.1@22.85,-2.45 15.95,-2.45 v1(13.1,0.4) 11.6,1.9 11.6,9.5 16.1,14 LS1.1
  Bottom Layer w0.25: C6.1 -6.15,-28.15 pad.5@-3.8,-28.15
  Bottom Layer w0.8: C15.2 v1@-20,-0.1 ; v1@-19.4,-0.3 v1(-19.4,-0.2) ; v1(-11.2,-0.3) -8.8,-2.7 5.8,-2.7 8.9,0.4 v1(13.1,0.4) ; C6.1 v2(-6.2,-26.8) ; -2.4,-25.9 -2.4,-24.8 -1.9,-24.3 -0.45,-24.3 v2@-0.35,-24.2 ; v2(-0.3,-24.2) v2@-0.35,-24.2 ; 0.8,-2.8 0.8,-8.45 0.8,-13.4 0.8,-14.3 C7.1@3.8,-17.3 ; R10.1 R11.1 ; R13.2 R11.1 ; C25.1 24.5,14.1 LS1.1 VD1.1 ; v4(35.7,-23) 34.7,-22 DA5.3 30.1,-22 29.7,-21.6 C9.2 26.85,-21.6 25.725,-20.475 21.35,-20.475 20.625,-21.2 14.8,-21.2 ; v2@-0.35,-24.2 2.65,-21.2 14.8,-21.2 ; 14.8,-21.2 R11.1
GND: C2.2 C3.2 C4.2 C5.2 C6.2 C7.2 C8.1 C9.1 C10.1 C11.1 C12.1 C13.1 C14.2 C15.1 C16.2 C17.1 C18.1 C19.2 C21.2 C22.2 C23.1 C24.2 C25.2 C26.2 DA2.7 DA4.1 DA5.1 DA6.2 DA7.2 DA8.2 DA8.5 DD1.1 DD1.15 DD1.38 DD2.1 DD3.2 DD3.6 pad.1@35.7,23.28 pad.2@-27.25,16.96 pad.2@-38,16.83 pad.3@26.15,2.45 pad.3@-26.15,-2.45 pad.4@-3.15,-28.8 pad.6 pad.7@-11.975,-19.2 pad.8@-3.8,-26.65 pad.14 pad.15@-1,-27.65 pad.17@-2.4,-27.4 pad.23 R2.2 R4.2 R6.2 R7.2 R8.2 R12.1 R19.1 R20.1 R24.1 VT3.2 XS1.A1B12 XS1.B1A12 XS1.Shell | length 285.8
  Top Layer w0.7: v1(-30.4,-14.3) v1@-30.3,-14.2
  Top Layer w0.8: pad.2@-38,16.83 -37.87,16.96 -27.25,16.96 -25.96,16.96 -24.5,15.5 v1(-24.5,5.6) v1(-24.5,-0.1) -25.4,-0.1 -26.15,-0.85 pad.3@-26.15,-2.45 ; v1(-31.2,-6.2) -31.2,-13.5 v1(-30.4,-14.3) ; 26.15,0.65 pad.3@26.15,2.45 ; DD1.1@28.1,-1.3 DD1.1@29.395,-1.3
  Top Layer w1: 14.775,-19.2 v1(19.8,-19.2)
  Bottom Layer w0.25: -7.298,-9.2 C10.1 -3.4,-9.4 DA4.1 ; pad.6@-3.8,-27.65 -3.15,-27.65 pad.17@-2.9,-27.9 ; pad.8@-3.8,-26.65 -3.15,-26.65 pad.17@-2.9,-26.9 ; -1.3,-9.826 -1.3,-11 C8.1 ; pad.15@-1,-27.625 -1,-27.65 -2.15,-27.65 -2.4,-27.4 -2.15,-27.15 pad.14
  Bottom Layer w0.3: pad.4@-3.15,-28.8 -3.15,-28.15 pad.17@-2.9,-27.9
  Bottom Layer w0.4: pad.7@-11.975,-19.2 -11.975,-18.125 -11.65,-17.8 -11.325,-18.125 -11.325,-19.2 -11.325,-20.425
  Bottom Layer w0.5: DA2.7 -12.06,-15.3 -11.65,-15.71 -11.65,-17.8 ; pad.17@-2.025,-27.4 0.25,-27.4 0.525,-27.675 v2(0.525,-28.325)
  Bottom Layer w0.6: DD3.2 -15.35,-7.25 -14.4,-8.2 DD3.6 -12.8,-8.2 -12.4,-8.6 C23.1 -8.475,-8.6 C22.2 ; C6.2 -4.875,-29.8 v2(-4.375,-29.3) ; -4.625,-36.625 -4.625,-38.975 -3.2,-40.4 XS1.B1A12 -3.57,-41.17 XS1.Shell@-4.32,-41.92 ; C4.2 -4.375,-30.725 v2(-4.375,-29.3) ; -3.3,-28.8 -3.4,-28.9 -3.4,-29.3 v2(-4.375,-29.3) ; -1.8,8.9 -1.6,9.1 -1.6,12.55 DD2.1 ; XS1.A1B12 3.57,-41.17 XS1.Shell@4.32,-41.92 ; v2(5.5,15.9) 5.6,15.9 6.125,15.375 DA8.2 ; DA8.5 6.125,9.6 v1(6.925,8.8) ; R6.2 R8.2 R7.2 ; R12.1 v1(19.8,-19.2) 26.425,-19.2 27.225,-20 C9.1 ; v1@30.4,-20 v1(30.425,-19.975) v1@30.45,-20 ; DA5.1 DA5.1@32.1,-19.85
  Bottom Layer w0.7: DA6.2 v1(-30.4,-14.3) ; DA7.2 v1(-30.4,-14.3) ; -23.3,-15.05 R24.1 -27.15,-15.05 C18.1 -27.9,-14.3 v1(-30.4,-14.3)
  Bottom Layer w0.8: C19.2 v1(-31.2,-6.2) ; C15.1@-22.75,-0.05 -24.4,-0.05 -24.501,-0.053 -27.101,-0.118 -28.35,-0.15 -30.7,2.2 -30.7,15.3 -29.04,16.96 -27.25,16.96 -25.74,16.96 -25.2,17.5 C17.1 -14.25,17.5 -5.65,8.9 -1.8,8.9 C26.2 ; C21.2 -15.419,-12.2 -14.625,-11.406 -14.625,-11.025 v1(-13.6,-10) ; XS1.Shell@-4.32,-46.1 XS1.Shell@-4.32,-41.92 ; XS1.Shell@4.32,-46.1 XS1.Shell@4.32,-41.92 ; R19.1 15.75,-5.715 DD1.15@18.385,-5.715 ; 16.9,-7.2 DD1.15@18.385,-5.715 ; C16.2 21.575,15.775 23.7,17.9 C25.2 C24.2 28.55,17.9 VT3.2 28.6,19.1 32.78,23.28 35.7,23.28 37.42,23.28 39.7,21 39.7,11.5 36.775,8.575 36.775,6.7 34.775,4.7 ; 21.485,-5.715 DD1.15 DD1.15@18.385,-5.715 ; C9.1 v1@30.4,-20 ; v1@30.45,-20 DA5.1 ; DA5.1@32.1,-19.85 C11.1 ; 34.1,-3.4 35.5,-3.4 36.825,-4.725 DD1.1@36.825,-8.575 ; DD1.1@36.78,-8.575 36.78,-10.355 37.1,-10.675 C12.1 C13.1 38.65,-14.25 39.625,-15.225 C14.2@39.625,-17.4
  Bottom Layer w1: -4.45,-35.95 R2.2 -2.75,-36 C2.2 ; v1(39.625,-19.975) C14.2@39.625,-17.4
  other v1: -11.5,-43.25 -9.25,-43.25 -7,-43.25 -14.05,-43.1 -6.975,-40.75 -9.225,-40.725 -16.175,-40.7 -18.225,-40.675 -14,-40.675 -11.6,-40.675 -20.483,-40.587 -22.75,-38.5 -20.3,-38.5 14.5,-38.5 17,-38.5 19.5,-38.5 22,-38.5 -18.148,-38.45 -15.9,-38.4 -13.5,-38.4 19.448,-36.473 22.103,-36.434 24.707,-36.434 -20.373,-36.377 -15.9,-36.3 -28.25,-36.25 -26.5,-36.25 -24.75,-36.25 -22.75,-36.25 -18.123,-36.25 14.5,-36.25 17,-36.25 -13.5,-36.2 27.5,-34.7 -15.8,-34.6 -28.25,-34.5 -24.75,-34.5 -22.75,-34.5 -20.4,-34.5 -18.1,-34.5 -13.6,-34.4 14.3,-33.8 16.7,-33.7 19.1,-33.6 24.8,-33.5 22,-33.4 -15.8,-32.8 -28.25,-32.75 -26.5,-32.75 -24.75,-32.75 -22.75,-32.75 -18.123,-32.75 -13.6,-32.7 -20.373,-32.623 27.6,-32 30.2,-31.8 -6.5,-31.3 16.8,-31.1 14.3,-31 19.1,-31 -18.2,-30.7 -15.9,-30.7 32.5,-29.7 30.2,-29.6 11.9,-28.9 14.3,-28.8 16.8,-28.7 35.4,-28.1 -8.5,-28 -16.052,-27.877 32.6,-27.5 30.3,-27.4 11.8,-26.9 -9.8,-26.6 14.4,-26.3 16.8,-26.3 35.5,-25.8 37.6,-25.8 -16.1,-25.5 30.2,-25.1 32.6,-25 16.8,-24.2 38.9,-24 -16.1,-22.9 39.6,-21.9 -18.2,-20.4 -16.1,-20.4 -20.4,-20.3 -22.4,-20.1 41.3,-20 -22.4,-18 -20.5,-18 -18.3,-18 -16.1,-18 -22.4,-15.7 -16.2,-15.7 -20.327,-15.627 -18.3,-15.6 42.2,-12.525 39.2,-12.425 -7.6,-11.2 -5.6,-11.1 -3.7,-11.1 -11.1,-10 13,-10 15,-10 11.5,-8.4 10.5,-6.5 27.4,-5.4 29.3,-5.4 10.5,-4.5 12.5,-2.6 10.5,-2.5 29.5,4.3 26.2,4.5 22.9,4.75 -28.5,5.2 -36.9,5.3 -32.7,5.3 -36.9,7.6 -32.5,7.8 -28.5,7.8 -15.4,10.5 -11.5,10.5 -8.1,10.6 -15.5,13.2 -11.6,13.2 -19.5,15.75 -11.75,15.75 -15.5,15.8 -5.2,18.1 4.2,18.1 4.3,20.6 6.75,20.65 9.175,20.675 -9.25,21 -5.3,21 -18.8,21.1 -15.7,21.2 -15.7,23.4 16.3,24.4 -15.7,25.7 31,26.25 7.1,27.65 -15.7,27.8 -10.4,27.8 -7.4,27.8 15.6,27.8 10.025,27.825 12.775,27.825 -13.1,27.9 31,28.5 -15.7,30.1 -18.1,30.2 -13.3,30.2 13.4,30.5 15.8,30.8 29,31 -13.3,32.4 -15.8,32.5 -18.1,32.6 -28.25,32.75 -26.5,32.75 -24.75,32.75 -22.75,32.75 -20.5,32.75 15.7,32.9 13.4,33 18.5,33 21.25,33 23.75,33 26.25,33 -13.3,34.3 -28.25,34.5 -24.75,34.5 -22.75,34.5 -20.5,34.5 -18.1,34.5 -15.9,34.5 15.6,35.5 21.25,35.5 23.75,35.5 26.25,35.5 18.6,35.6 -28.25,36.25 -26.5,36.25 -24.75,36.25 -22.75,36.25 -20.5,36.25 -18.2,36.3
  other v2: 7.75,-44.5 6.1,-44.3 10,-44.25 12.25,-44.25 6.1,-42.5 7.75,-42.5 10,-42.5 12.25,-42.5 14.5,-42.5 17,-42.25 10,-40.5 12.25,-40.5 14.5,-40.5 17,-40.5 19.5,-40.5 10,-39.1 12.2,-39.1 42.4,-17.6 42.5,-15.8 39.1,-14.1 40.8,-14.1 42.4,-14.1 16.8,-10 23.7,-5.3 25.5,-5.3 21.9,-5.2 28,1.9 29.5,1.9 31,1.9
NetBAT1_1: C3.1 C4.1 Designator3.1 Designator3.2 Designator3.3 Designator4.1 Designator4.2 Designator4.3 pad.2@-2.15,-28.8 pad.3@-2.65,-28.8 pad.22@9.65,-36.25 pad.22@-9.65,-36.25 R1.1 | length 84.2
  Top Layer w1.4: 0,-35.2 v3(0,-33.5) v3(0,-32.2)
  Top Layer w2: Designator3.3 -10,-35.9 -9.65,-36.25 -1.05,-36.25 0,-35.2 1.05,-36.25 9.65,-36.25 10,-35.9 Designator4.3 7.45,-29.05 Designator4.1 Designator4.2
  Bottom Layer w0.25: pad.3@-2.65,-28.8 -2.65,-29.65 -2.4,-29.9 -2.15,-29.65 pad.2@-2.15,-28.8
  Bottom Layer w0.6: C3.1@-2.5,-32.8 C4.1 -2.4,-30.9 -2.4,-29.9
  Bottom Layer w1: Designator3.2 -6.3,-24 -4.2,-21.9 R1.1
  Bottom Layer w1.2: C3.1@-2.6,-33.5 v3(0,-33.5) v3(0,-32.2)
  Bottom Layer w2: pad.22@-9.65,-36.25 -10,-35.9 Designator3.3 -10,-31.2 -12.55,-28.65 Designator3.1 Designator3.2 ; pad.22@9.65,-36.25 10,-35.9 Designator4.3
NetBAT1_2: C1.2 DA1.6 DA2.2 Designator1.1 Designator1.2 Designator1.3 Designator2.1 Designator2.2 Designator2.3 pad.2@-11.975,-13.3 pad.3@-11.325,-13.3 pad.22@9.65,36.25 pad.22@-9.56,36.25 | length 118.8
  Top Layer w2: Designator1.3 -10,35.81 -9.56,36.25 0.045,26.645 ; v5(0,-17.5) v3(0,-16.1) 0,26.6 0.045,26.645 ; Designator2.3 10,35.9 9.65,36.25 0.045,26.645
  Bottom Layer w0.5: DA2.2 -13.8,-17.2 -14.2,-16.8 -14.2,-12.8 -12.9,-11.5 -11.65,-11.5 ; DA1.6 -5.25,-15.275 C1.2@-3.875,-15.275
  Bottom Layer w0.8: -11.65,-13.6 -11.65,-11.65 -10.25,-11.65 -8.8,-13.1 -4.7,-13.1 -3.7,-14.1 C1.2 -0.8,-15.3 v3(0,-16.1)
  Bottom Layer w1.2: v5(0,-17.5) v3(0,-16.1)
  Bottom Layer w2: Designator1.3 -10,35.81 pad.22@-9.56,36.25 ; pad.22@9.65,36.25 10,35.9 Designator2.3
NetC1_1: C1.1 DA1.5 R1.2 | length 6.2
  Bottom Layer w0.4: DA1.5 -6.775,-15.025 -4.925,-16.875 C1.1@-3.875,-16.875
  Bottom Layer w0.5: C1.1@-3.875,-16.875 C1.1@-3.7,-17.05
  Bottom Layer w0.8: R1.2 -3.7,-18.35 C1.1@-3.7,-17.05
NetC16_1: C16.1 DD1.3 R16.2 VT1.3 | length 56.4
  Top Layer w0.8: v1(23.2,19.4) 29.8,19.4 33.2,16 33.2,11.55 35.075,9.675 35.075,-5.14 v1(34.24,-5.975)
  Bottom Layer w0.8: R16.2 11.45,15.35 10.95,15.85 10.95,18.4 12.65,20.1 VT1.3 20.6,20.1 21.2,19.5 ; C16.1 21.2,19.5 ; v1(23.2,19.4) 21.5,19.4 21.3,19.6 21.2,19.5 ; DD1.3 v1(34.24,-5.975) v1@34.24,-5.91
NetC18_2: C18.2 DA6.3 R23.1 R24.2 | length 7.7
  Bottom Layer w0.7: DA6.3 -28.825,-16.6 C18.2 -26.5,-16.6 -25.95,-17.15 R24.2 -24.7,-19.55 R23.1
NetC20_1: C20.1 DA7.1 pad.15@-24.7,-12.7 R27.2 R28.1 Rt1.2 | length 10.3
  Bottom Layer w0.7: DA7.1 -24.7,-12.625 -22.275,-12.625 R28.1 -20.325,-12.7 C20.1
NetC20_2: C20.2 DA7.4 R25.2 R26.1 V1.1 | length 32.2
  Bottom Layer w0.7: V1.1 -36.3,-9.454 R25.2 -34.95,-13.05 -32.1,-10.2 ; DA7.4 -32.075,-10.175 -32.1,-10.2 ; C20.2 -19.5,-7 -20.3,-6.2 R26.1 -27.2,-5.3 -27.9,-4.6 -32,-4.6 -32.7,-5.3 -32.7,-9.6 -32.1,-10.2
NetC21_1: C21.1 DD3.1 pad.24 R28.2 | length 13.2
  Bottom Layer w0.5: pad.24 -17.5,-5.8 -17.5,-7.7 -17,-8.2 DD3.1
  Bottom Layer w0.6: R28.2 C21.1
  Bottom Layer w0.7: C21.1 DD3.1
NetC24_1: C24.1 R29.1 VT3.1 | length 7.9
  Bottom Layer w0.8: R29.1 27.45,11.825 27.75,12.125 27.75,14.95 26.7,16 C24.1 28.35,16.3 VT3.1
NetDA1_1: DA1.1 DA2.4 pad.4@-10.675,-13.3 | length 11.2
  Bottom Layer w0.25: -10.36,-14.315 -10.465,-14.315 -11.035,-14.885 -11.035,-16.925 -10.76,-17.2 DA2.4
  Bottom Layer w0.4: pad.4@-10.675,-13.3 -10.675,-14 -10.36,-14.315 -9.56,-14.315 -7.775,-16.1 -6.774,-16.1 -5.825,-17.049 DA1.1
NetDA1_2: DA1.2 R4.1 | length 3.1
  Bottom Layer w0.4: R4.1@-6.775,-20.6 DA1.2
NetDA1_3: DA1.3 DA2.5 pad.5@-10.675,-19.2 | length 7.6
  Bottom Layer w0.25: DA2.5 -9.575,-15.3 -7.725,-17.15 DA1.3
  Bottom Layer w0.4: pad.5@-10.675,-19.2 -10.675,-18.5 -10.45,-18.275 -9.525,-18.275 -8.75,-17.5 DA1.3
NetDA2_1: 
NetDA3_1: pad.1@-1.65,-28.8 R5.2 R6.1 | length 7.9
  Bottom Layer w0.25: pad.1@-1.65,-28.8 -1.65,-29.45 -0.15,-30.95 R5.2 ; R5.2@2.7,-31.5 R6.1@4.525,-33.325
NetDA3_7: DD1.8 HL1.2 pad.7@-3.8,-27.15 R30.2 | length 49
  Top Layer w0.8: v1(7.1,-17.55) 8.85,-15.8 25.75,-15.8 v1(27.95,-13.6) 28,-13.6 v1@28.1,-13.5
  Bottom Layer w0.25: pad.7@-3.8,-27.15 -4.75,-27.15 -5,-26.9 -5,-24.8 0.6,-19.2 6.55,-19.2 7.1,-18.65 v1(7.1,-17.55)
  Bottom Layer w0.8: R30.2 27.3,-14.2 v1@27.9,-13.6 ; DD1.8 27.89,-13.59 v1@27.9,-13.6 ; v1(27.95,-13.6) v1@27.9,-13.6
NetDA3_9: DD1.6 HL2.2 pad.9 R31.2 | length 48
  Top Layer w0.8: v1(9.9,-17.55) 26.5,-17.55 v1(30.325,-13.725)
  Bottom Layer w0.25: pad.9 -3.5,-25.65 -3.5,-24.5 1,-20 8.9,-20 9.9,-19 v1(9.9,-17.55)
  Bottom Layer w0.8: R31.2 29.8,-14 30.075,-13.725 v1(30.325,-13.725) ; v1@30.375,-13.725 DD1.6@30.375,-8.575
NetDA3_12: pad.12 R7.1 | length 7.3
  Bottom Layer w0.25: pad.12 -1.65,-25.425 3.175,-25.425 R7.1
NetDA3_16: pad.16 R8.1 | length 7.1
  Bottom Layer w0.25: pad.16 -1,-28.8 0.1,-29.9 3.45,-29.9 R8.1
NetDA6_1: DA6.1 DA6.4 DA7.3 R25.1 V1.2 | length 16.1
  Bottom Layer w0.5: DA6.1 -31.35,-16.85 -31,-17.2 -29.8,-17.2 -29.45,-17.55 DA6.4
  Bottom Layer w0.7: V1.2 -36.3,-18.946 R25.1 -33.875,-15.15 -33.025,-14.3 ; DA6.1 -33.025,-14.3 ; DA7.3 -33.025,-14.3
NetDD1_7: DD1.7 R12.2 R13.1 | length 22.1
  Bottom Layer w0.8: R13.1 R12.2 ; 18.5,-15.4 18.5,-7.8 19.1,-7.2 28.625,-7.2 29.16,-7.735 DD1.7
NetDD1_9: DD1.9 R21.1 S2.3 S2.4 | length 92.9
  Top Layer w0.8: S2.3 -29.54,2.24 -28.3,1 -28.3,-3.6 -26.7,-5.2 -9.8,-5.2 v1(-5.4,-0.8) ; v1@5.6,0.4 v1(5.6,0.6) 6.2,0 6.2,-9.775 10.55,-14.125 24.975,-14.125 v1(25.5,-13.6)
  Top Layer w1: S2.4 S2.3
  Bottom Layer w0.8: v1(-5.4,-0.8) -4,0.6 v1(5.6,0.6) ; R21.1@24.8,-15.75 R21.1 24.8,-14.3 v1(25.5,-13.6) 26.62,-12.48 DD1.9
NetDD1_12: DD1.12 R22.1 S1.1 S1.2 | length 33.5
  Top Layer w0.8: v1(22.825,-11.05) 25.275,-8.6 34.4,-8.6 37.25,-5.75 S1.2 S1.1
  Bottom Layer w0.8: R22.1 22.3,-12.625 22.825,-12.1 v1(22.825,-11.05) 22.825,-8.59 DD1.12
NetDD1_25: DD1.25 R15.1 VT2.3 | length 10.3
  Bottom Layer w0.8: R15.1 11.45,10.35 12,9.8 15.25,9.8 VT2.3 16.05,9 DD1.25@20.225,9
NetDD1_26: DD1.26 R14.2 | length 3.3
  Bottom Layer w0.8: DD1.26 21.55,8.585 R14.2
NetDD1_27: DD1.27 R29.2 | length 4.1
  Bottom Layer w0.6: DD1.27 22.81,10.385 24.25,11.825 R29.2
NetDD1_33: DD1.33 DD3.4 pad.4@-27.25,11.88 pad.4@-38,11.75 | length 87.9
  Top Layer w0.8: pad.4@-38,11.75 -37.87,11.88 pad.4@-27.25,11.88 ; v1(15.75,4.375) 22.85,11.475 v1(30,11.475)
  Bottom Layer w0.65: DD3.4 -13.7,4.3 -13.65,4.35
  Bottom Layer w0.8: pad.4@-27.25,11.88 -25.42,11.88 -17.89,4.35 -13.65,4.35 15.725,4.35 v1(15.75,4.375) ; v1(30,11.475) 30.43,11.045 DD1.33
NetDD1_34: DD1.34 pad.5@35.7,13.12 | length 7.3
  Bottom Layer w0.8: DD1.34 31.735,8.61 31.735,11.11 33.745,13.12 pad.5@35.7,13.12
NetDD1_35: DD1.35 pad.4@35.7,15.66 | length 12.8
  Bottom Layer w0.8: DD1.35 32.97,10.545 33.45,11.025 36.9,11.025 37.8,11.925 37.8,14.925 37.065,15.66 pad.4@35.7,15.66
NetDD1_36: DD1.36 DD3.3 pad.3@-27.25,14.42 pad.3@-38,14.29 | length 91.5
  Top Layer w0.65: v1(-16.1,1.8) -15.9,1.8 v1(-10.7,7)
  Top Layer w0.8: pad.3@-38,14.29 -37.87,14.42 pad.3@-27.25,14.42
  Bottom Layer w0.65: DD3.3@-16.1,-6.2 -16.1,1.1 ; 34.175,7.4 34.24,7.465 DD1.36
  Bottom Layer w0.8: pad.3@-27.25,14.42 -24.62,14.42 -17.2,7 v1(-10.7,7) 33.775,7 34.175,7.4
NetDD2_2: DD2.2 R15.2 R16.1 R33.2 | length 11.4
  Bottom Layer w0.5: R33.2 3.65,12.5 9.35,12.5
  Bottom Layer w0.8: DD2.2 2.75,13.1 R33.2 ; R15.2 9.35,12.5 R16.1
NetHL1_1: HL1.1 R11.2 | length 11.4
  Bottom Layer w0.8: HL1.1@6.9,-13.85 7.1,-13.65 7.1,-12.9 7.9,-12.1 13.1,-12.1 14.8,-13.8 R11.2
NetHL2_1: HL2.1 R10.2 | length 2.8
  Bottom Layer w0.6: HL2.1@10.6,-14.05 11.85,-14.05 12.3,-14.5 R10.2
NetHL3_2: pad.2@26.15,-2.45 pad.4@-22.85,-2.45 | length 53.1
  Top Layer w0.8: pad.4@-22.85,-2.45 -10.15,-2.45 v1(-6.7,1) ; v1(16,0.5) 16.8,-0.3 23.2,-0.3 25.35,-2.45 pad.2@26.15,-2.45
  Bottom Layer w0.8: v1(-6.7,1) -5.25,2.45 14.05,2.45 v1(16,0.5)
NetHL3_4: DA8.4 R14.1 | length 15.4
  Top Layer w0.8: v2(13.3,8.4) 15.325,10.425 v1(18,10.425)
  Bottom Layer w0.6: DA8.4 9.675,8.4 v2(13.3,8.4)
  Bottom Layer w0.8: v1(18,10.425) 18,11.325 18.525,11.85 R14.1
NetLS1_2: LS1.2 VD1.2 VT3.3 | length 4.6
  Bottom Layer w0.8: VD1.2 LS1.2 30.9,16.7 VT3.3
NetR2_1: R2.1 R3.1 XS1.A5 | length 8.7
  Top Layer w0.4: v1(-2.8,-38.7) v1@-2.475,-39.025
  Top Layer w0.6: v1@-2.475,-39.025 v1(1.25,-39.025)
  Bottom Layer w0.3: XS1.A5 v1(1.25,-39.025) 1.25,-38.275 1.475,-38.05 R3.1
NetR17_1: R17.1 VT1.1 | length 2.3
  Bottom Layer w0.8: VT1.1 16.4,16.2 R17.1
NetR17_2: pad.2@35.7,20.74 R17.2 VT2.2 | length 26.2
  Top Layer w0.8: v1(18.7,16.5) 18.7,17.8 21.7,20.8 35.64,20.8 pad.2@35.7,20.74
  Bottom Layer w0.8: VT2.2 16.4,13.5 R17.2 18,13.8 18.7,14.5 v1(18.7,16.5)
NetR18_1: R18.1 VT2.1 | length 2.3
  Bottom Layer w0.8: R18.1 14.5,13.5 VT2.1
NetR18_2: pad.3@35.7,18.2 R18.2 VT1.2 | length 43.6
  Top Layer w0.8: v1(12.6,17.5) 17.1,22 29.6,22 33.525,25.925 37.075,25.925 38.5,24.5 38.5,19.4 37.3,18.2 pad.3@35.7,18.2
  Bottom Layer w0.8: v1(12.6,17.5) 12.6,16.4 13.1,15.9 R18.2 14.5,16.2 VT1.2
NetR19_2: R19.2 S1.3 S1.4 | length 34.6
  Top Layer w0.8: v1(13,-5.9) 14.325,-7.225 30.675,-7.225 32.76,-5.14 S1.4 S1.3
  Bottom Layer w0.8: v1(13,-5.9) 13,-4.85 14.25,-3.6 R19.2
NetR20_2: R20.2 S2.1 S2.2 | length 14
  Top Layer w1: S2.2 S2.1
  Bottom Layer w1: v1(-33.1,-2.2) -33.05,-2.25 R20.2
NetR26_2: pad.15@-24.7,-9 R26.2 R27.1 Rt1.1 | length 6.8
  Bottom Layer w0.7: R26.2 R27.1 Rt1.1 -24.7,-9 pad.15@-24.7,-8.6
NewNetDA8_3: DA8.3 R32.1 | length 3.6
  Bottom Layer w0.6: R32.1 7.075,17.475 DA8.3
NewNetHL3_4: pad.4@22.85,2.45 R32.2 | length 27.7
  Top Layer w0.8: v2(9.125,15.65) 9.125,6.375 v2(9.825,5.675) ; v2(13.2,5.675) 13.2,3.575 14.325,2.45 pad.4@22.85,2.45
  Bottom Layer w0.8: v2(9.125,15.65) R32.2 ; v2(9.825,5.675) v2(13.2,5.675)
"V ESP": C11.2 C12.2 C13.2 C14.1 C26.1 DA5.2 DA8.6 DD1.2 DD2.3 R21.2 R22.2 R30.1 R31.1 R33.1 | length 88
  Top Layer w0.6: v1(4.825,8.8) 4.825,7.9 8.3,4.425 8.3,-8.7 11.925,-12.325 31.425,-12.325 v1(32.625,-13.525)
  Bottom Layer w0.6: DD2.3 2.85,11.1 3,10.95 C26.1 ; C26.1@2.9,8.8 v1(4.825,8.8) 4.825,10.65 DA8.6 ; v1@4.85,9.1 v1@4.85,9.15 ; R22.2 R21.2 R30.1 R31.1 30.35,-17.55 31.6,-16.3 32.9,-16.3 33.7,-17.1 ; v1(32.625,-13.525) 32.625,-13.675 32.35,-13.95 33.7,-15.3 33.7,-17.1 ; C12.2@35.425,-11.9 35.51,-11.815 DD1.2 ; C12.2 C13.2 35.5,-16.425 36.2,-17.125 C14.1 ; v4(35.7,-19.9) 35.6,-20 DA5.2 33.85,-18.15 C11.2 ; C14.1@36.1,-17.4 35.725,-17.775 33.925,-17.775 C11.2 ; C11.2 33.7,-17.1
pads on no net: DA1.4 DA2.1 DA2.8 DD1.4 DD1.5 DD1.10 DD1.11 DD1.13 DD1.14 DD1.16 DD1.17 DD1.18 DD1.19 DD1.20 DD1.21 DD1.22 DD1.23 DD1.24 DD1.28 DD1.29 DD1.30 DD1.31 DD1.32 DD1.37 XS1.3 XS1.A6 XS1.A7 XS1.A8 XS1.B5 XS1.B6 XS1.B7 XS1.B8

## Polygon pours and split planes (outlines as drawn)
GND on Bottom Layer "GND" (solid, pour order 2): 17.6,-6.35 17.6,-12.75 5.8,-12.75 5.8,-14.7 5.15,-15.35 3.7,-15.35 2,-13.65 2,-6.35 3.95,-6.35 9.4,-0.9 14.4,-0.9 14.4,-3.051 11.95,-5.501 11.95,-6.35
GND on Bottom Layer "GND" (solid, remove dead copper, pour order 12): -29,28.2 -28.1,28.2 -28.1,23.9 -29,23.9 -29,23.2 -30.4,21.8 -34,21.8 -36.4,19.4 -36.4,10.5 -36.9,10 -38.6,10 -39.5,9.1 -39.5,-0.1 -37.8,-1.8 -23,-1.8 -22,-0.8 -22,0.9 -17.8,0.9 -16,2.7 -16,4.3 -18.6,4.3 -28.8,14.5 -28.8,15.3 -28.1,16 -24.6,16 -17,8.4 0.1,8.4 0.1,14.3 3.987,14.3 11.2,21.2 20.605,21.2 18.269,24.109 18.269,28.867 20.876,31.2 26.168,31.2 28.8,28.664 28.8,23.76 25.932,20.7 23.9,20.7 23.9,18 33,18 34,19 34,21.1 35.3,22.4 35.6,22.4 35.7,22.5 36.2,22 37.4,22 37.4,17.1 38.8,15.7 38.8,11.1 38.9,11 45.65,11 44.95,13.75 43.984,16.443 42.302,20.374 39.7,25.125 37,28.867 34.35,32 31.375,34.95 27.676,38 23.775,40.575 20.475,42.325 16.975,43.825 14.45,44.725 11.868,45.5 10,45.925 10,38 9.75,37.75 9.248,37.75 9.248,46.096 6,46.625 1.125,46.975 -0.112,47.01 -2.475,46.925 -4.875,46.775 -7.6,46.4 -9.253,46.096 -9.253,38.123 -10,38.122 -10,45.925 -10.487,45.812 -14.125,44.825 -17.375,43.675 -20.375,42.375 -22.875,41.075 -26.125,39.075 -27.575,38.05 -29,37
GND on Bottom Layer "GND" (solid, pour order 4): 32.6,-6.1 20.9,-6.1 20.5,-5.7 20.5,5.225 21.375,6.1 35.625,6.1 35.625,-3.075
GND on Bottom Layer "GND" (solid, remove dead copper, pour order 0): -2.35,-26.9 -7,-26.9 -8.426,-25.474 -8.426,-22.886 -7.54,-22 -5.7,-22 -5.7,-20.932 -6.304,-20.328 -6.946,-20.328 -6.946,-18.646 -2.7,-14.4 -0.3,-14.4 -0.3,-8.5 -15,-8.5 -15,-11.495 -17.905,-14.4 -23.378,-14.4 -23.378,-20.423 -22.902,-20.9 -21.375,-21.3 -19.7,-22.525 -18.35,-23.875 -18.35,-28.15 -21.375,-31.175 -28.25,-31.175 -29.025,-31.95 -29.003,-31.972 -29.003,-37 -27,-38.475 -24.747,-39.978 -22.625,-41.225 -19.3,-42.875 -15.813,-44.288 -13.45,-45.1 -10.95,-45.75 -6.2,-46.6 -0.775,-47 4.1,-46.85 9.125,-46.1 14.45,-44.75 20.362,-42.437 24.8,-39.978 27.025,-38.475 30.225,-35.975 33.002,-33.48 34.791,-31.691 36.425,-29.775 38.3,-27.2 39.715,-25.257 40.704,-23.496 42.91,-19.301 43.648,-17.566 44.975,-13.725 45.725,-11.05 37.825,-11.05 36.7,-11.05 36.677,-14.827 37.825,-15.975 37.825,-18.646 37.825,-22.575 36.301,-24.099 28.775,-24.101 28.775,-28.52 25.945,-31.35 21.048,-31.35 18.35,-28.652 18.35,-22.525 5.75,-22.525 1.024,-27.251 6.176,-34 11.2,-34 11.2,-37.082 7.271,-40.7 3.925,-40.7 3.925,-41.8 -3.402,-41.8 -3.7,-41.502 -3.7,-32.9 -2.35,-31.55
GND on Top Layer "GND" (solid, remove dead copper, pour order 10): 31.7,-4.9 30.1,-6.5 26.4,-6.5 14.9,-6.5 13.3,-4.9 11,-4.9 11,1.3 16.2,-3.9 26.3,-3.9 26.3,-2.3 23.7,0.3 23.7,3.6 18.3,3.6 18.3,5.7 23.3,10.7 32.6,10.7 34,9.3 34,5.7 33.4,5.1 31.7,5.1
GND on Top Layer "GND" (solid, remove dead copper, pour order 8): 20.675,-8.075 21.3,-8.7 21.45,-8.7 21.45,-10.475 20.425,-11.5 10.65,-11.5 6.575,-7.425 6.575,7.125 4.125,9.575 2.575,9.575 2.575,25.725 15.875,39.025 23.2,39.025 26.7,36.8 30.1,34.2 33.562,30.738 36.575,27.225 30.75,21.4 22.4,21.4 11.325,10.325 11.325,-5.725 13.626,-8.026
GND on Top Layer "GND" (solid, remove dead copper, pour order 14): -28.8,27.55 -27.2,27.55 -27.2,26.8 -27.25,26.75 -28.8,26.75 -28.8,23.5 -26,20.7 -26,10.7 -26.6,10.1 -27.2,10.1 -38.5,10.1 -39.8,8.8 -39.8,3.2 -22.5,3.2 -20.9,1.6 -15.5,1.6 -2,15.1 -2,24.9 -15.8,38.7 -24,38.7 -26.5,37 -28.785,35.239 -28.8,35.2
GND on Top Layer "GND" (solid, remove dead copper, pour order 6): -2.175,-24.3 0.6,-24.3 2.537,-22.363 4.8,-24.8 7.38,-21.98 6.2,-20.8 6.2,-18.6 27.225,-18.6 34.775,-11.05 45.675,-11.05 44.925,-13.8 43.8,-17.1 41.725,-21.65 39.125,-26.05 36.275,-29.9 33.375,-33.125 29.55,-36.525 27.225,-38.275 25.05,-39.775 20.675,-42.225 16.1,-44.15 11.85,-45.475 7.3,-46.45 2.925,-46.9 0,-47.025 -3.25,-46.9 -5.6,-46.65 -7.941,-46.304 -10.3,-45.85 -12.625,-45.3 -16.1,-44.15 -19.575,-42.775 -24.425,-40.2 -29,-37 -28.978,-31.2 -21.775,-31.2 -18.35,-27.775 -18.35,-23.85 -19.8,-22.5 -21.4,-21.3 -22.9,-20.9 -23.4,-20.4 -23.4,-15 -22.875,-14.475 -19.1,-14.475 -19.1,-8.825 -2.55,-8.825 -2.175,-9.2

## Other copper
Top Layer:
  pour cut-out: 4.18,27.533 3.312,26.568 5.813,24.632 6.64,25.632
  pour cut-out: -4.565,27.485 -6.539,25.618 -5.885,24.965 -3.915,26.835
  pour cut-out: -9.314,24.63 -10.886,24.63 -10.886,23.169 -9.314,23.169 -9.314,23.186 -9.314,23.8
  pour cut-out: 10.786,24.73 9.214,24.73 9.214,23.269 10.786,23.269 10.786,23.286 10.786,23.9
  pour cut-out: 3.5,-34.838 3.5,-31.2 0.2,-31.2 1.009,-32.009 1.009,-34.212 1.635,-34.838
  pour cut-out: 7.919,5.804 7.919,5.976 8.652,6.709 10.793,6.709 10.793,4.608 8.982,4.608 8.982,4.742
  pour cut-out: 8.3,-37.614 8.3,-40 -3.808,-40 -3.808,-37.614
  pour cut-out: 27.2,-24.45 27.2,-27.55 25.05,-29.7 21.95,-29.7 19.8,-27.55 19.8,-24.45 21.95,-22.3 25.05,-22.3
  pour cut-out: 27.2,27.55 27.2,24.45 25.05,22.3 21.95,22.3 19.8,24.45 19.8,27.55 21.95,29.7 25.05,29.7
  pour cut-out: -19.8,27.55 -19.8,24.45 -21.95,22.3 -25.05,22.3 -27.2,24.45 -27.2,27.55 -25.05,29.7 -21.95,29.7
  pour cut-out: -19.825,-24.425 -19.825,-27.525 -21.975,-29.675 -25.075,-29.675 -27.225,-27.525 -27.225,-24.425 -25.075,-22.275 -21.975,-22.275
  pour cut-out: 33.954,-17.848 33.954,-24.254 34.3,-24.6 37,-24.6 37.4,-24.2 37.4,-18.5 31.669,-14.156 30.612,-15.212
  text "dAir-aster-0.0.0.2" at -13.35,39.475 h1.52
Bottom Layer:
  pour cut-out: -11.714,22.1 -13.286,22.1 -13.286,19.9 -11.714,19.9 -11.714,20.586 -11.714,21.2
  pour cut-out: -9.014,34.63 -10.586,34.63 -10.586,33.169 -9.014,33.169 -9.014,33.186 -9.014,33.8
  pour cut-out: 10.586,34.73 9.014,34.73 9.014,33.269 10.586,33.269 10.586,33.286 10.586,33.9
  pour cut-out: 13.286,22.63 11.714,22.63 11.714,21.169 13.286,21.169 13.286,21.186 13.286,21.8
  pour cut-out: -9.214,24.63 -10.786,24.63 -10.786,23.169 -9.214,23.169 -9.214,23.186 -9.214,23.8